# Altium PCB Led Lighting.PcbDoc
Units mil, origin at the board's own origin, x right, y up, seen from the top; angles counter-clockwise.
Board outline 2310 x 1235 mil, 2 copper layers (Top Layer, Bottom Layer); 13 components, 24 nets, 66 pads, 4 vias.
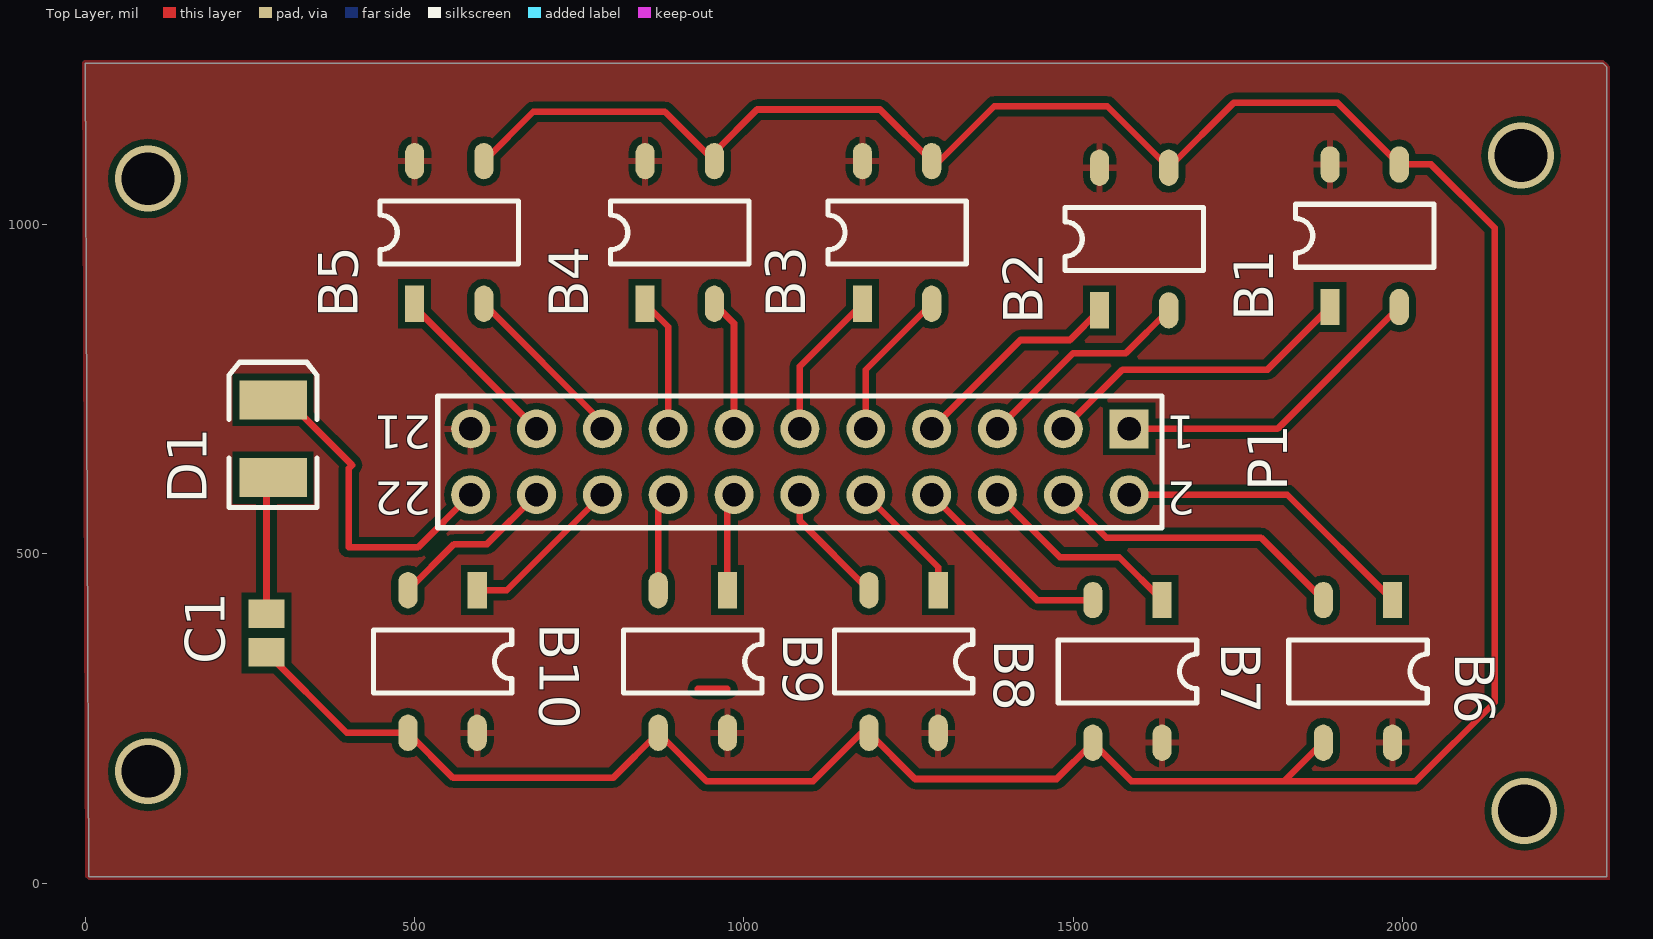
[diagram p0: Top Layer view]
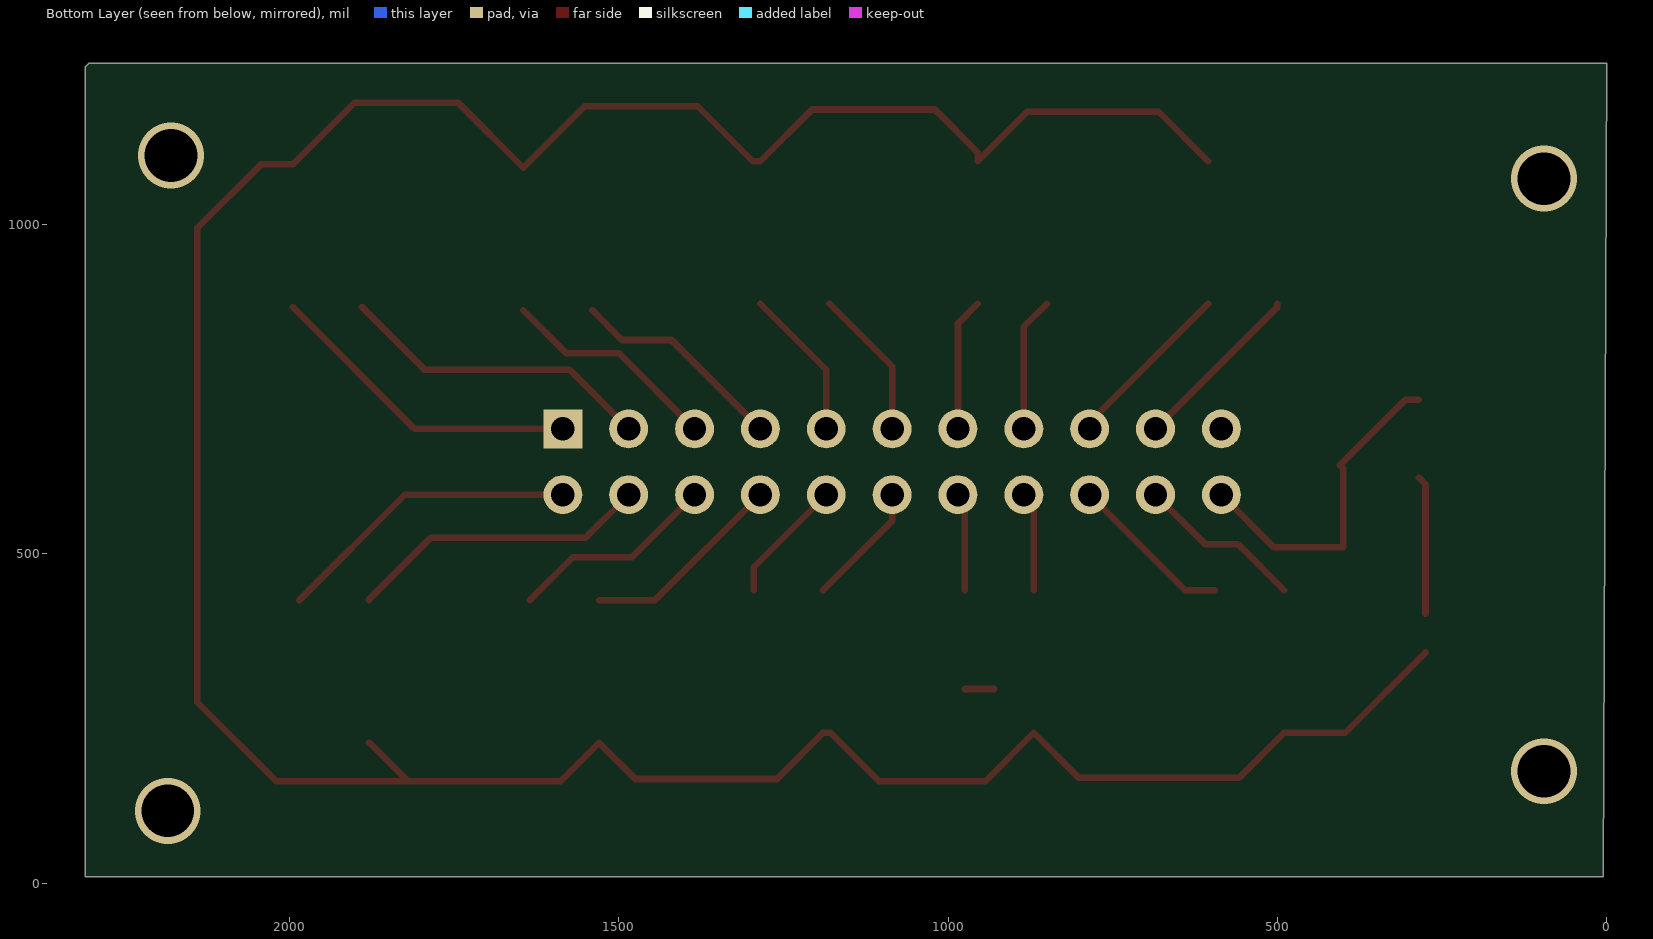
[diagram p1: Bottom Layer view, seen from below]

## Layer stack, top to bottom
Top Layer: signal copper 1.4
Dielectric: dielectric 12.6, FR-4, Dk 4.8
Bottom Layer: signal copper 1.4

## Board outline
0,1245 2305,1245 2310,1240 2310,10 5,10

## Design rules (kind name [scope] priority, off if disabled: settings)
Clearance [All] p1: gap=10
PolygonConnect [All] p1: connectstyle=Relief reliefconductorwidth=10 reliefentries=4 polygonreliefangle="90 Angle" airgapwidth=10
RoutingVias [All] p1: holewidth=28 width=50 viastyle="Through Hole" minholewidth=28 minwidth=50 maxholewidth=28 maxwidth=50
SolderMaskExpansion [All] p1: expansion=4
Width [All] p1: maxlimit=10 minlimit=10 preferedwidth=10
28 further rules are at their usual default settings.

## Components (designator, comment, footprint, x,y, rotation, side; value= is the part's Value field where it differs from the comment)
B1 "" MB6S 1890,875 r90 top
B2 "Bridge MB6s 2" MB6S 1540,870 r90 top
B3 "Bridge MB6s 3" MB6S 1180,880 r90 top
B4 "Bridge MB6s 4" MB6S 850,880 r90 top
B5 "Bridge MB6s 5" MB6S 500,880 r90 top
B6 "Bridge MB6s 6" MB6S 1985,430 r270 top
B7 "Bridge MB6s 7" MB6S 1635,430 r270 top
B8 "Bridge MB6s 8" MB6S 1295,445 r270 top
B9 "Bridge MB6s 9" MB6S 975,445 r270 top
B10 "Bridge MB6s 10" MB6S 595,445 r270 top
C1 "Cap Pol3" C0805 275,380 r90 top
D1 "LED3" 3.5X2.8X1.9 285,675 r90 top
P1 "Header 11X2" HDR2X11 1585,690 r180 top

## Footprints (in the part's own frame and the unit in brackets; to place one, negate y for a bottom-side part, rotate by r counter-clockwise, add the part's x,y. Pads: shape width x height; smd on the part's side, far side on the other; paste and mask are expansions set on the pad)
3.5X2.8X1.9 [mm] "SM LED; 2 C-Bend Leads; Body 3.5 x 2.8 x 1.9 mm, inc leads (LxWxH typ)"
  rect 1.5x2.6 smd: 1(-1.5,0) 2(1.5,0)
  silkscreen extent -2.65,-1.7 2.95,1.7
C0805 [mm] "Chip Capacitor, Body 2.0x1.3mm, IPC High Density"
  rect 1.1x1.4 smd: 1(-0.75,0) 2(0.75,0)
  body extent -1.1,-0.72 1.1,0.72, height 1.4
HDR2X11 [mm] "Connector; Header; 11x2 Position"
  rect 1.5x1.5 hole 0.9: 1(0,0)
  round 1.5 hole 0.9: 2(0,2.54) 3(2.54,0) 4(2.54,2.54) 5(5.08,0) 6(5.08,2.54) 7(7.62,0) 8(7.62,2.54) 9(10.16,0) 10(10.16,2.54) 11(12.7,0) 12(12.7,2.54) 13(15.24,0) 14(15.24,2.54) 15(17.78,0) 16(17.78,2.54) 17(20.32,0) 18(20.32,2.54) 19(22.86,0) 20(22.86,2.54) 21(25.4,0) 22(25.4,2.54)
  silkscreen extent -1.27,-1.27 26.67,3.81
MB6S [mm]
  rect 1.4x0.74 smd: 1(0,0)
  oval 1.4x0.74 smd: 2(0,-2.67) 3(5.5,-2.67) 4(5.5,0)
  silkscreen extent 1.53,-4 3.97,1.33

## Part data
B1 B2 B3 B4 B5 B6 B7 B8 B9 B10: library part "Bridge MB6s"
C1: "Polarized Capacitor (Surface Mount)"
D1: "Typical BLUE SiC LED"
P1: "Header, 11-Pin, Dual row"

## Via types
v1: diameter 100, hole 80, Top Layer to Bottom Layer, 4 vias

## Nets (pads, with @x,y where several pads share a name; then routed paths per layer and width w, separated by ;. In a path a pad name is that pad's centre, name@x,y a point inside that pad or via, vN(x,y) a via of type N, cw(c..) or ccw(c..) an arc to the next point about the centre after c; other vN are vias at no path point)
1: B1.1 P1.3 | length 481.6
  Top Layer w10: P1.3 1575,780 1795,780 B1.1
2: B1.2 P1.1 | length 486.7
  Top Layer w10: P1.1 1810.12,690 B1.2
3: B2.1 P1.7 | length 329.6
  Top Layer w10: P1.7 1420,825 1495,825 B2.1
4: B2.2 P1.5 | length 334.7
  Top Layer w10: P1.5 1500,805 1580.12,805 B2.2
5: B3.1 P1.11 | length 229.4
  Top Layer w10: P1.11 1085,785 B3.1
6: B3.2 P1.9 | length 231.5
  Top Layer w10: P1.9 1185,779.88 B3.2
7: B4.1 P1.15 | length 204.5
  Top Layer w10: B4.1 885,845 P1.15
8: B4.2 P1.13 | length 202.4
  Top Layer w10: B4.2 985,850.12 P1.13
9: B5.1 P1.19 | length 266.6
  Top Layer w10: B5.1 500,875 P1.19
10: B5.2 P1.17 | length 264.5
  Top Layer w10: B5.2 785,700.12 P1.17
11: B6.1 P1.2 | length 466.3
  Top Layer w10: P1.2 1825,590 B6.1
12: B6.2 P1.4 | length 461.2
  Top Layer w10: P1.4 1550.12,524.88 1785,524.88 B6.2
13: B7.1 P1.6 | length 316.3
  Top Layer w10: P1.6 1480,495 1570,495 B7.1
14: B7.2 P1.8 | length 311.2
  Top Layer w10: P1.8 1445,430 B7.2
15: B8.1 P1.10 | length 190.6
  Top Layer w10: P1.10 1295,480 B8.1
16: B8.2 P1.12 | length 188.4
  Top Layer w10: P1.12 1085,549.88 B8.2
17: B9.1 P1.14 | length 149.1
  Top Layer w10: B9.1 975,580 P1.14
18: B9.2 P1.16 | length 151.3
  Top Layer w10: B9.2 869.88,574.88 P1.16
19: B10.1 P1.18 | length 250.1
  Top Layer w10: B10.1 640,445 P1.18
20: B10.2 P1.20 | length 255.2
  Top Layer w10: B10.2 559.88,515 610,515 P1.20
21: D1.2 P1.22 | length 506.2
  Top Layer w10: D1.2 305.94,734.06 405,635 400,630 400,510 505,510 P1.22
GND: B1.4 B2.4 B3.4 B4.4 B5.4 B6.4 B7.4 B8.4 B9.4 B10.4 P1.21
INPUT: B1.3 B2.3 B3.3 B4.3 B5.3 B6.3 B7.3 B8.3 B9.3 B10.3 C1.1 | length 4825.9
  Top Layer w10: C1.1 397.01,228.46 B10.3 558.35,160 801.42,160 B9.3 943.35,155 1105,155 1178.46,228.46 B8.3 1260,158.35 1474.76,158.35 B7.3 1588.35,155 1820,155 ; B5.3 680.24,1171.65 880,1171.65 B4.3 955.12,1110.12 1020,1175 1206.65,1175 B3.3 1296.54,1096.54 1380,1180 1551.65,1180 B2.3 1743.58,1185 1901.65,1185 B1.3 2043.46,1091.54 2140,995 2140,275 2020,155 1820,155 ; B6.3 1878.46,213.46 1820,155
NetC1_2: C1.2 D1.1 | length 210.6
  Top Layer w10: C1.2 275,605.94 D1.1
copper on no net: | length 45
  Top Layer w10: 930,295 975,295
  other v1: 2185,110 95,170 95,1070 2180,1105

## Polygon pours and split planes (outlines as drawn)
GND on Top Layer "Top Layer-No Net" (solid, pour order 7): -5,1250 2300,1250 2305,1250 2310,1245 2315,1240 2315,5 5,5 0,10

## Silkscreen, mask and mechanical layers (free items; w line width, h text height)
Mechanical 1:
  lines w10: -10,1260 -5,1255 -5,15 -5,5 2310,5 2310,1240 2290,1260 -10,1260

## Text inside footprints (layer, text, board x,y; h text height)
P1: Top Overlay "22" at 525,610 h50 r180; Top Overlay "21" at 525,710 h50 r180; Top Overlay "2" at 1685,610 h50 r180; Top Overlay "1" at 1685,710 h50 r180